# Allegro board TIDA-01606_HV_CARDE4_SCH_rev2.brd
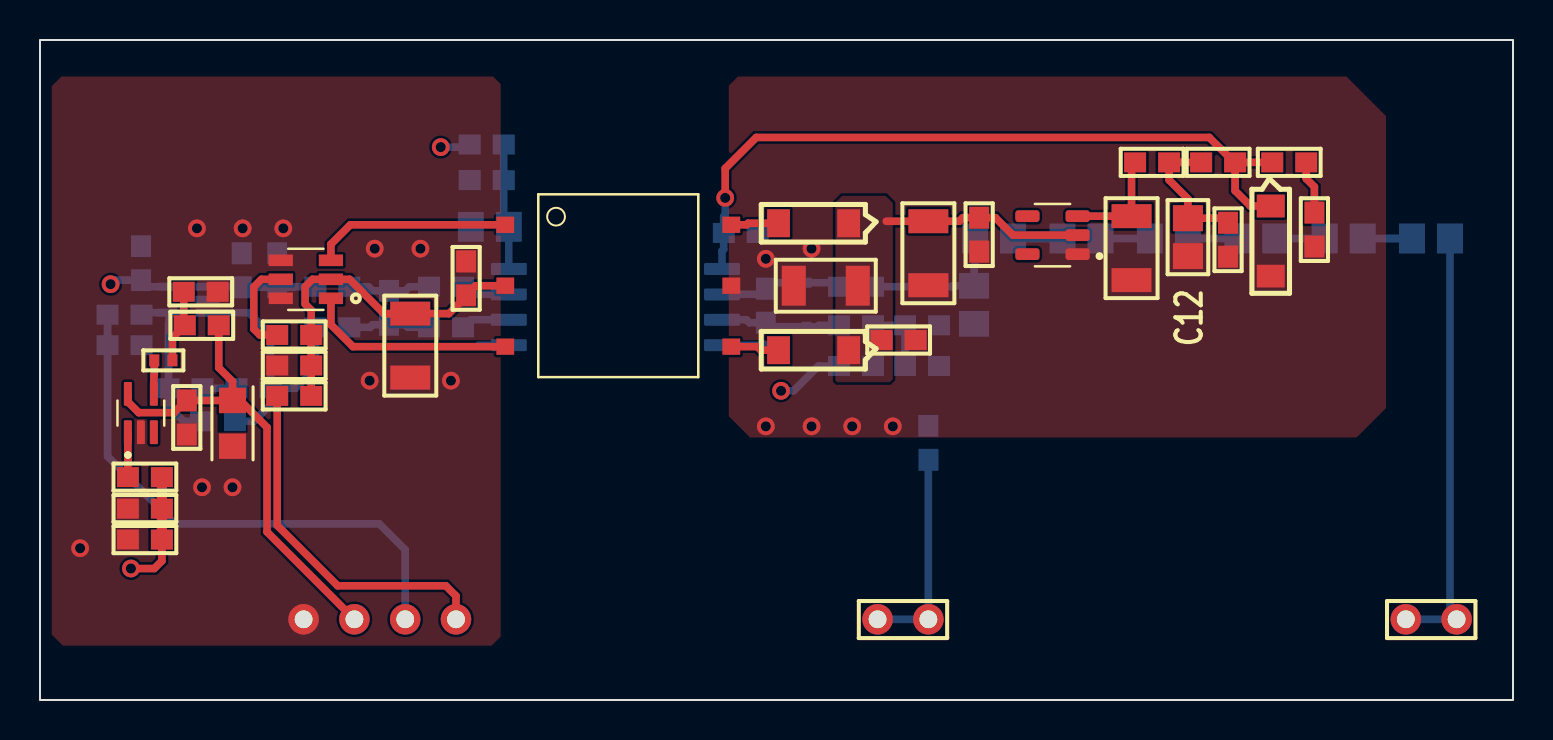
[diagram p0: board, top side]
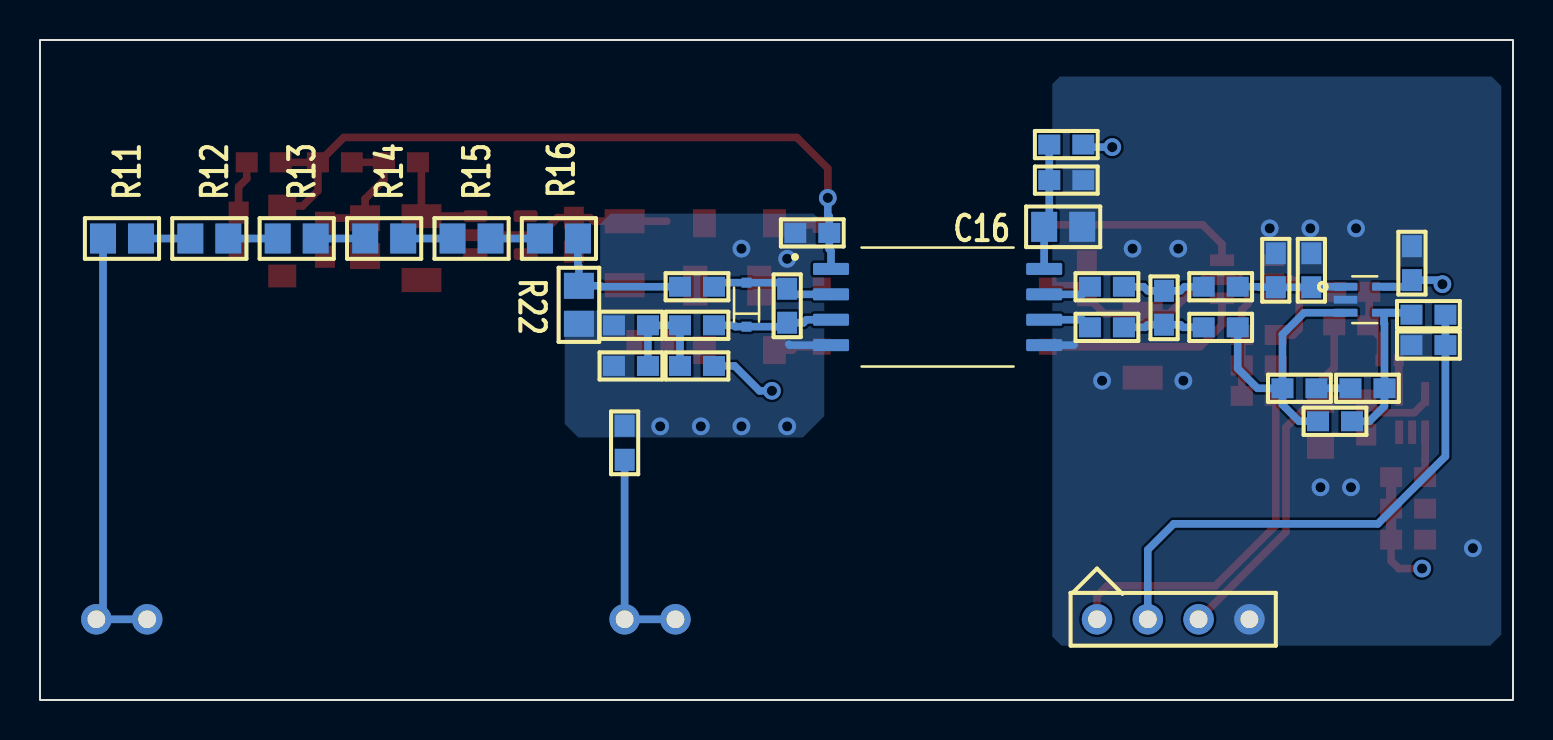
[diagram p1: board, bottom side, seen from below]

Outline 73.66 x 33.02 mm; copper layers: TOP, G1, G2, BOTTOM. Coordinates in mm from the lower left corner of the outline.
Outline path: rectangle 0,0 73.66,33.02

## Design rules (mm)
constraint set DEFAULT: min track width 0.127

## Placement (name value [footprint] x y rotation side)
C1  Ele 10u 10V 105C  [TAJA_AVX]  9.63 13.84 270 top
C2  0.1u 0603 50V  [RES0603]  7.34 14.14 270 top
C3  10u 1210 50V  [SNPD1210_MODIFIED]  18.52 17.73 270 top
C4  0.1uF 0603 50V  [RES0603]  12.71 16.74 180 top
C5  0.1u 0603 50V  [RES0603]  5.25 9.58 180 top
C6  0.1u 0603 50V  [RES0603]  21.31 21.09 90 top
C7  10u 1210 50V  [SNPD1210_MODIFIED]  39.29 20.73 180 top
C8  0.1u 0603 50V  [RES0603]  42.94 18.01 0 top
C9  0.1u 0603 50V  [RES0603]  46.96 23.28 270 top
C10  10u 1210 50V  [SNPD1210_MODIFIED]  44.42 22.35 270 top
C11  0.1u 1206 50V  [RES0603]  59.41 23.03 270 top
C12  10u 1210 50V  [SNPD0805_MODIFIED]  57.4 23.15 270 top
C13  0.1u 1206 50V  [SNPD1210_MODIFIED]  54.58 22.61 270 top
C14  0.01u 0603 50V  [RES0603]  8.9 13.94 180 bottom
C15  0.1u 0603 50V  [RES0603]  35.04 23.37 180 bottom
C16  0.1u 1206 50V  [SNPD0805_MODIFIED]  22.49 23.67 0 bottom
C17  0.1u 1206 50V  [RES0603]  22.34 26.01 0 bottom
C18  0.1u 0603 50V  [RES0603]  5.05 21.86 90 bottom
C19  0.01u 0603 16V  [RES0603]  36.3 19.72 270 bottom
C20  0.01u 0603 16V  [RES0603]  17.45 19.62 90 bottom
C21  0.1u 0603 50V  [RES0603]  4.23 17.75 0 bottom
C22  0.01u 0603 16V  [RES0603]  11.86 21.5 90 bottom
C23  0.1u 0603 50V  [RES0603]  44.11 16.71 0 bottom
D1  B0520LW-7-F 20V  [SOD123]  40.44 23.85 180 top
D2  B0520LW-7-F 20V  [SOD123]  40.44 17.5 180 top
D3  150060VS55040 Green  [RES0603]  63.73 23.53 90 top
D4  Zener 5.6V  [SOD123]  61.54 24.71 270 top
D5  CDSOD323-T03SC  [SOD323F]  38.33 19.78 270 bottom
DC+1  PBC02SGBN  [SIP_2PIN_BERGSTRIP]  70.84 4.04 270 top
DC-1  PBC02SGBN  [SIP_2PIN_BERGSTRIP]  44.42 4.04 270 top
J1  61300411021  [SIP4_RUP]  20.8 4.04 90 bottom
L1  742792662  [RES0603]  55.61 26.9 180 top
L2  74279228260  [RES0603]  22.34 27.79 0 bottom
R1  0E 0603 1%  [RES0603]  12.71 15.21 0 top
R2  56K 0603 5%  [RES0603]  5.25 11.15 0 top
R3  47K 0603 5%  [RES0603]  8.09 18.75 180 top
R4  0E 0603 5%  [RES0603]  44.42 12.87 270 bottom
R5  56K 0603 5%  [RES0603]  5.25 8.03 180 top
R6  56K 0402 5%  [RES0402]  6.17 16.99 180 top
R7  0E 0603 1%  [RES0603]  12.71 18.26 180 top
R8  47K 0603 5%  [RES0603]  8.04 20.42 0 top
R9  0E 0603 5%  [RES0603]  58.91 26.9 180 top
R10  330E 0603 5%  [RES0603]  62.47 26.9 180 top
R11  332K 0102 1%  [SNPD0805_MODIFIED]  69.56 23.09 180 bottom
R12  332K 0102 1%  [SNPD0805_MODIFIED]  65.19 23.09 180 bottom
R13  332K 0102 1%  [SNPD0805_MODIFIED]  60.82 23.09 180 bottom
R14  332K 0102 1%  [SNPD0805_MODIFIED]  56.45 23.09 180 bottom
R15  332K 0102 1%  [SNPD0805_MODIFIED]  52.08 23.09 180 bottom
R16  332K 0102 1%  [SNPD0805_MODIFIED]  47.71 23.09 180 bottom
R17  0E 0603 5%  [RES0603]  10.68 15.6 180 bottom
R18  7.50K 0603 1%  [RES0603]  7.28 15.6 180 bottom
R19  39E 0603 5%  [RES0603]  40.81 20.68 180 bottom
R20  4.70K 0603 1%  [RES0603]  20.31 18.64 180 bottom
R21  4.70K 0603 1%  [RES0603]  14.62 18.64 180 bottom
R22  3.60K 0102 5%  [SNPD0805_MODIFIED]  46.71 19.77 270 bottom
R23  100E 0603 1%  [RES0603]  4.23 19.28 180 bottom
R24  4.70K 0603 1%  [RES0603]  20.31 20.68 180 bottom
R25  4.70K 0603 1%  [RES0603]  14.62 20.68 180 bottom
R26  3.16K 0603 1%  [RES0603]  44.11 18.75 180 bottom
R27  39E 0603 5%  [RES0603]  40.81 18.75 180 bottom
R28  31.6K 0603 1%  [RES0603]  40.81 16.71 0 bottom
R29  15K 0603 1%  [RES0603]  10.08 21.5 270 bottom
T1  750343804  [TOROID_SMD_6PIN_1123]  28.92 20.73 0 top
U1  TI-TPS22944DCK5  [SOT65P210X110-5N]  5.04 14.36 90 top
U2  SN6505  [SOT95P280X145-6N]  13.29 21.05 180 top
U3  TLV70433DBVT  [SOT95P280X145-5N]  50.63 23.26 180 top
U4  AMC1311DWVR  [SOIC127P1150X280-8N]  28.77 19.66 180 bottom
U5  AMC1311DWVR  [SOT65P210X110-5N]  7.41 20.03 180 bottom

## Library data of the parts
C1 = CAP: User Part Number: PN; Tolerance: TOL; room: 24Vcc3_smps
C2-C23 = CAP NP: room: control_smps
D1 D2 D4 = DIODE ZENER: room: control_smps
D3 = LED: room: lcd_led_pic
D5 = DIODE TVS BI-DIR
DC+1 DC-1 = CON2: room: InputPowe_smps
J1 = HEADER 4_0
L1 L2 = RESISTOR_0: room: control_smps
R1-R29 = RESISTOR: room: control_smps
T1 = TRANSFORMER STEPUP_0
U1 = DM3AT-SF-PEJM5_0
U2 = DM3AT-SF-PEJM5_1
U3 = DM3AT-SF-PEJM5_2
U4 = DM3AT-SF-PEJM5_3
U5 = DM3AT-SF-PEJM5_4

## Footprints (pads in the part's own frame, mm; a bottom-side part is the same pattern mirrored in y, then rotated)
RES0402
  rect 0.5x0.6 smd: 1(-0.455,0) 2(0.455,0)
RES0603
  rect 1.1x1 smd: 1(-0.85,0) 2(0.85,0)
SIP4_RUP
  round 1.524 hole 0.889: 1(0,0) 2(0,-2.54) 3(0,-5.08) 4(0,-7.62)
SIP_2PIN_BERGSTRIP
  round 1.524 hole 0.889: 1(0,0) 2(0,-2.54)
SNPD0805_MODIFIED
  rect 1.3x1.5 smd: 1(-0.95,0) 2(0.95,0)
SNPD1210_MODIFIED
  rect 1.2x2 smd: 1(-1.6,0) 2(1.6,0)
SOD123
  rect 1.143x1.397 smd: 1(0,0) 2(3.505,0)
SOD323F
  rect 0.5x0.5 smd: 1(1.1,0) 2(-1.1,0)
SOIC127P1150X280-8N
  custom 1.8x0.6 smd: 1(-5.33,1.905) 2(-5.33,0.635) 3(-5.33,-0.635) 4(-5.33,-1.905) 5(5.33,-1.905) 6(5.33,-0.635) 7(5.33,0.635) 8(5.33,1.905)
SOT65P210X110-5N
  custom 1.19x0.4 smd: 1(-0.96,0.65) 2(-0.96,0) 3(-0.96,-0.65) 4(0.96,-0.65) 5(0.96,0.65)
SOT95P280X145-5N
  custom 1.21x0.59 smd: 1(-1.255,0.95) 2(-1.255,0) 3(-1.255,-0.95) 4(1.255,-0.95) 5(1.255,0.95)
SOT95P280X145-6N
  rect 1.21x0.58 smd: 1(-1.255,0.95) 2(-1.255,0) 3(-1.255,-0.95) 4(1.255,-0.95) 5(1.255,0) 6(1.255,0.95)
TAJA_AVX
  rect 1.269x1.346 smd: 1(-1.143,0) 2(1.143,0)
TOROID_SMD_6PIN_1123
  rect 0.889x0.813 smd: 1(-5.652,3.048) 2(-5.652,0) 3(-5.652,-3.048) 4(5.652,-3.048) 5(5.652,0) 6(5.652,3.048)

## Nets
3.3V: C1.1 C2.1 J1.3 R3.1 U1.5
3.3V_ISO: C15.2 D4.1(CATHODE) R9.1 R10.2 R28.1 U4.1
3.3V_LS: C5.1 C18.1 L2.1 R2.2 R5.1 U5.5
5V: J1.1 R1.1
6V: C7.1 C8.1 C9.1 C10.1 D1.1(CATHODE) D2.1(CATHODE) U3.2
GND_AMC: C7.2 C8.2 C9.2 C10.2 C11.2 C12.2 C13.2 C15.1 C23.2 D3.1(CATHODE) D4.2 R4.1 R22.2 R26.1 T1.5(NC2) U3.1 U4.4
0: C1.2 C2.2 C3.2 C4.2 C5.2 C6.2 C16.1 C17.1 C18.2 C21.2 C22.2 J1.4 R5.2 R8.2 R29.1 U1.2 U2.4 U2.6 U4.5 U5.2(V-)
DC+: DC+1.1 DC+1.2 R11.1
DC-: DC-1.1 DC-1.2 R4.2
VDC_SEN: C21.1 J1.2 R23.2
N14282127: R2.1 U1.1(VOUT)
N14282426: R6.2 U1.4
N14282456: R3.2 R6.1 R8.1
N14283151: C3.1 C4.1 C6.1 R1.2 R7.1 T1.2 U2.2(VCC)
N14283155: R7.2 U2.5
N14283577: T1.1 U2.3
N14283744: T1.3 U2.1
N14285027: D1.2 T1.6
N14285036: D2.2 T1.4
N14286486: C13.1 L1.2 U3.3(OUT)
N14286527: C11.1 C12.1 L1.1 R9.2
N14287197: D3.2 R10.1
N14288330: R16.2 R19.1 R22.1
N14288334: C19.1 D5.2 R19.2 U4.2
N14288391: C23.1 R26.2 R27.1 R28.2
N14288393: C19.2 D5.1 R27.2 U4.3
N14290058: C20.1 R20.2 R21.1
N14290074: C20.2 R24.2 R25.1
N14290818: C22.1 R25.2 R29.2 U5.1
N14291266: R20.1 U4.6
N14291397: R24.1 U4.7(VOUTP)
N14291912: C16.2 C17.2 L2.2 U4.8
N14293246: C14.1 R17.1 R21.2 U5.3
N14294698: C14.2 R18.2 R23.1 U5.4
N142896200: R15.2 R16.1
N142896460: R14.2 R15.1
N142896840: R13.2 R14.1
N142897000: R12.2 R13.1
N142897400: R11.2 R12.1
N142946331: R17.2 R18.1

Pads without a net: U1 3; U3 4 5

## Via types
v1: diameter 0.889, hole 0.508, TOP to BOTTOM, 21 vias

## Routing (per net, layer and track width the routed paths; a pad name or vN(x,y) marks a point on that pad's centre or on a via; arc(x,y) is an arc through that point)
3.3V: length 23.8
  TOP w0.381: U1.5 4.39,14.92 4.94,14.38 6.71,14.38 7.32,14.99 C2.1 C1.1 ; R3.1 8.94,16.63 9.63,15.94 C1.1 ; C1.1 10.01,14.99 11.35,13.64 11.35,8.41 J1.3
3.3V_ISO: length 51.3
  TOP w0.381: D4.1 60.53,24.71 59.76,25.48 R9.1 ; R9.1 R10.2 ; R9.1 59.71,26.9 58.47,28.14 35.81,28.14 34.26,26.59 v1(34.26,25.12)
  G2 w0.381: v1(34.26,25.12) 34.26,21.64 37.06,18.85 v1(37.06,15.47)
  BOTTOM w0.381: U4.1 34.1,22.46 34.19,22.55 C15.2 34.19,24.19 34.26,24.26 v1(34.26,25.12) ; v1(37.06,15.47) 37.68,15.47 38.93,16.71 R28.1
3.3V_LS: length 45.8
  TOP w0.381: v1(4.55,6.58) 5.71,6.58 6.1,6.96 R5.1
  TOP w0.508: R5.1 C5.1 R2.2
  G2 w0.381: v1(4.55,6.58) 4.55,8.92 3.53,9.93 v1(3.53,20.8) 3.53,22.94 8.26,27.66 v1(20.04,27.66)
  BOTTOM w0.381: L2.1 21.36,27.66 v1(20.04,27.66) ; v1(3.53,20.8) 3.73,21.01 C18.1 5.38,20.68 U5.5
5V: length 18
  TOP w0.381: J1.1 20.8,5.21 20.29,5.72 14.88,5.72 11.86,8.74 R1.1
6V: length 10
  TOP w0.381: U3.2 48.65,23.26 47.78,24.13 C9.1 46.15,24.13 45.97,23.95 C10.1 42.32,23.95
GND_AMC: length 2.1
  BOTTOM w0.381: 36.22,17.81 36.17,17.75 U4.4
  vias: v1(36.3,22.07) v1(36.3,13.69) v1(38.58,22.58) v1(38.58,13.69) v1(40.61,13.69) v1(42.65,13.69)
0: length 1.5
  BOTTOM w0.381: U4.5 21.95,17.75
  vias: v1(2.01,7.59) v1(7.85,23.6) v1(8.1,10.64) v1(9.63,10.64) v1(10.13,23.6) v1(12.17,23.6) v1(16.48,15.98) v1(16.74,22.58) v1(19.02,22.58) v1(20.55,15.98)
DC+: length 21.7
  BOTTOM w0.381: R11.1 70.51,4.37 DC+1.1 DC+1.2
DC-: length 10.5
  BOTTOM w0.381: R4.2 DC-1.1 DC-1.2
VDC_SEN: length 27.4
  BOTTOM w0.381: J1.2 18.26,7.52 16.97,8.81 6.76,8.81 3.38,12.19 C21.1 R23.2
N14282127: length 2.2
  TOP w0.381: R2.1 4.4,11.97 4.39,11.97 U1.1
N14282426: length 1.7
  TOP w0.381: U1.4 5.69,16.23 5.71,16.25 R6.2
N14282456: length 3.7
  TOP w0.381: R8.1 7.19,18.8 R3.2 6.62,18.13 R6.1
N14283151: length 17.1
  TOP w0.381: T1.2 21.79,20.73 C6.1 21.31,20.19 20.45,19.33 C3.1 17.2,19.33 15.48,21.05 U2.2 13.63,21.05 13.26,20.68 13.26,19.81 13.56,19.51 R7.1 C4.1 R1.2
N14283155: length 4.9
  TOP w0.381: R7.2 10.99,18.26 10.69,18.56 10.69,20.67 11.07,21.05 U2.5
N14283577: length 9.9
  TOP w0.381: U2.3 14.55,22.8 15.52,23.77 T1.1
N14283744: length 10.5
  TOP w0.381: T1.3 15.65,17.68 14.55,18.78 U2.1
N14285027: length 2.4
  TOP w0.381: D1.2 35.41,23.85 35.33,23.77 T1.6
N14285036: length 2.4
  TOP w0.381: D2.2 36.04,17.5 35.86,17.68 T1.4
N14286486: length 5.5
  TOP w0.381: L1.2 54.58,26.72 C13.1 U3.3
N14286527: length 6.9
  TOP w0.381: R9.2 L1.1 56.46,26.01 57.4,25.07 C12.1 59.18,24.1 C11.1
N14287197: length 2.7
  TOP w0.381: R10.1 63.32,26.08 63.73,25.67 63.73,24.38
N14288330: length 7.5
  BOTTOM w0.381: R16.2 46.76,21.74 46.71,21.69 R22.1 45.64,20.72 45.6,20.68 R19.1
N14288334: length 6.2
  BOTTOM w0.381: U4.2 36.02,20.29 C19.1 36.6,20.88 D5.2 39.75,20.88 R19.2
N14288391: length 5.7
  BOTTOM w0.381: R28.2 R27.1 R26.2 C23.1
N14288393: length 6
  BOTTOM w0.381: R27.2 38.96,18.75 38.9,18.68 D5.1 36.49,18.68 C19.2 35.48,18.87 35.33,19.02 U4.3
N14290058: length 4.1
  BOTTOM w0.381: R20.2 18.4,18.64 18.27,18.77 C20.1 16.63,18.77 16.5,18.64 R21.1
N14290074: length 4.2
  BOTTOM w0.381: R24.2 18.47,20.68 18.27,20.47 C20.2 16.63,20.47 16.43,20.68 R25.1
N14290818: length 5.4
  BOTTOM w0.381: R25.2 12.7,20.68 12.68,20.65 C22.1 R29.2 10.06,20.68 U5.1
N14291266: length 2.4
  BOTTOM w0.381: U4.6 21.54,19.02 R20.1
N14291397: length 2.4
  BOTTOM w0.381: R24.1 21.54,20.29 U4.7
N14291912: length 6.3
  BOTTOM w0.381: U4.8 C16.2 23.19,23.93 C17.2 L2.2
N14293246: length 13.9
  BOTTOM w0.381: R17.1 11.53,14.78 10.7,13.94 C14.1 ; R17.1 11.53,18.29 10.44,19.38 U5.3 ; R17.1 12.78,15.6 13.77,16.59 R21.2
N14294698: length 8
  BOTTOM w0.381: C14.2 7.18,13.94 6.43,14.7 R18.2 6.43,18.83 6.45,18.86 U5.4 5.18,19.38 R23.1
N142896200: length 2.5
  BOTTOM w0.381: R15.2 R16.1
N142896460: length 2.5
  BOTTOM w0.381: R14.2 R15.1
N142896840: length 2.5
  BOTTOM w0.381: R14.1 R13.2
N142897000: length 2.5
  BOTTOM w0.381: R13.1 R12.2
N142897400: length 2.5
  BOTTOM w0.381: R12.1 R11.2
N142946331: length 1.7
  BOTTOM w0.381: R18.1 R17.2

## Copper pours and planes (outline as drawn; the poured copper is in the pictures)
6V on TOP: 39.78,24.89 39.78,15.98 39.85,15.9 42.49,15.9 42.65,16.05 42.65,24.87 42.29,25.22 40.11,25.22
GND_AMC on TOP: 34.44,30.73 34.44,14.2 35.51,13.13 65.84,13.13 67.31,14.61 67.31,29.21 65.33,31.19 34.9,31.19
GND_AMC on BOTTOM: 34.44,23.8 34.44,14.2 35.51,13.13 46.74,13.13 47.42,13.82 47.42,19.41 47.35,19.48 45.85,19.48 45.64,19.69 45.64,23.83 45.14,24.33 34.98,24.33
0 on TOP, BOTTOM: 1.14,2.72 22.58,2.72 23.04,3.18 23.04,30.81 22.66,31.19 1.07,31.19 0.58,30.71 0.58,3.28
0 on G1: 1.14,2.72 22.58,2.72 23.04,3.18 23.04,30.81 22.66,31.19 1.07,31.19 0.58,30.71 0.58,3.28 ; 1 cut-out

## Text on the board
PLACE_BOUND_TOP: FIGURE | FINISHED_SIZE | 20.0 | 35.0 | DRILL CHART: TOP to BOTTOM | ALL UNITS ARE IN MILS | PLATED | QTY | 23 | 8
